# Altium PCB IGrippioV2Pcb.PcbDoc (part 1 of 2)
Units mil, origin at the board's own origin, x right, y up, seen from the top; angles counter-clockwise.
Board outline 2173.3 x 4360 mil, 2 copper layers (Top Layer, Bottom Layer); 134 components, 148 nets, 592 pads, 249 vias.
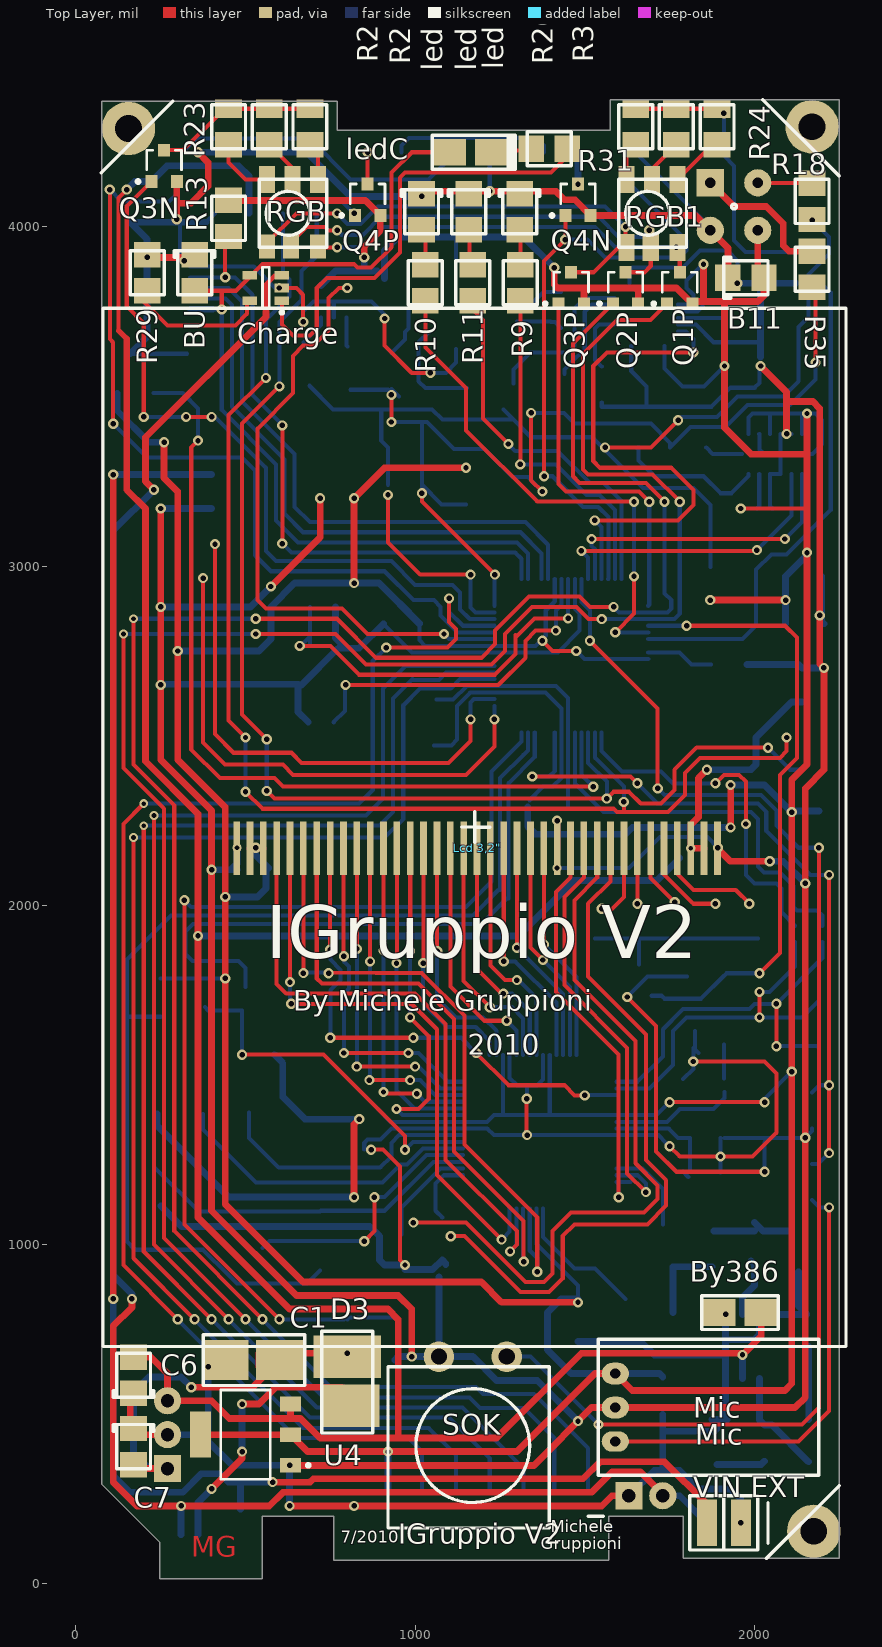
[diagram p0: Top Layer view]
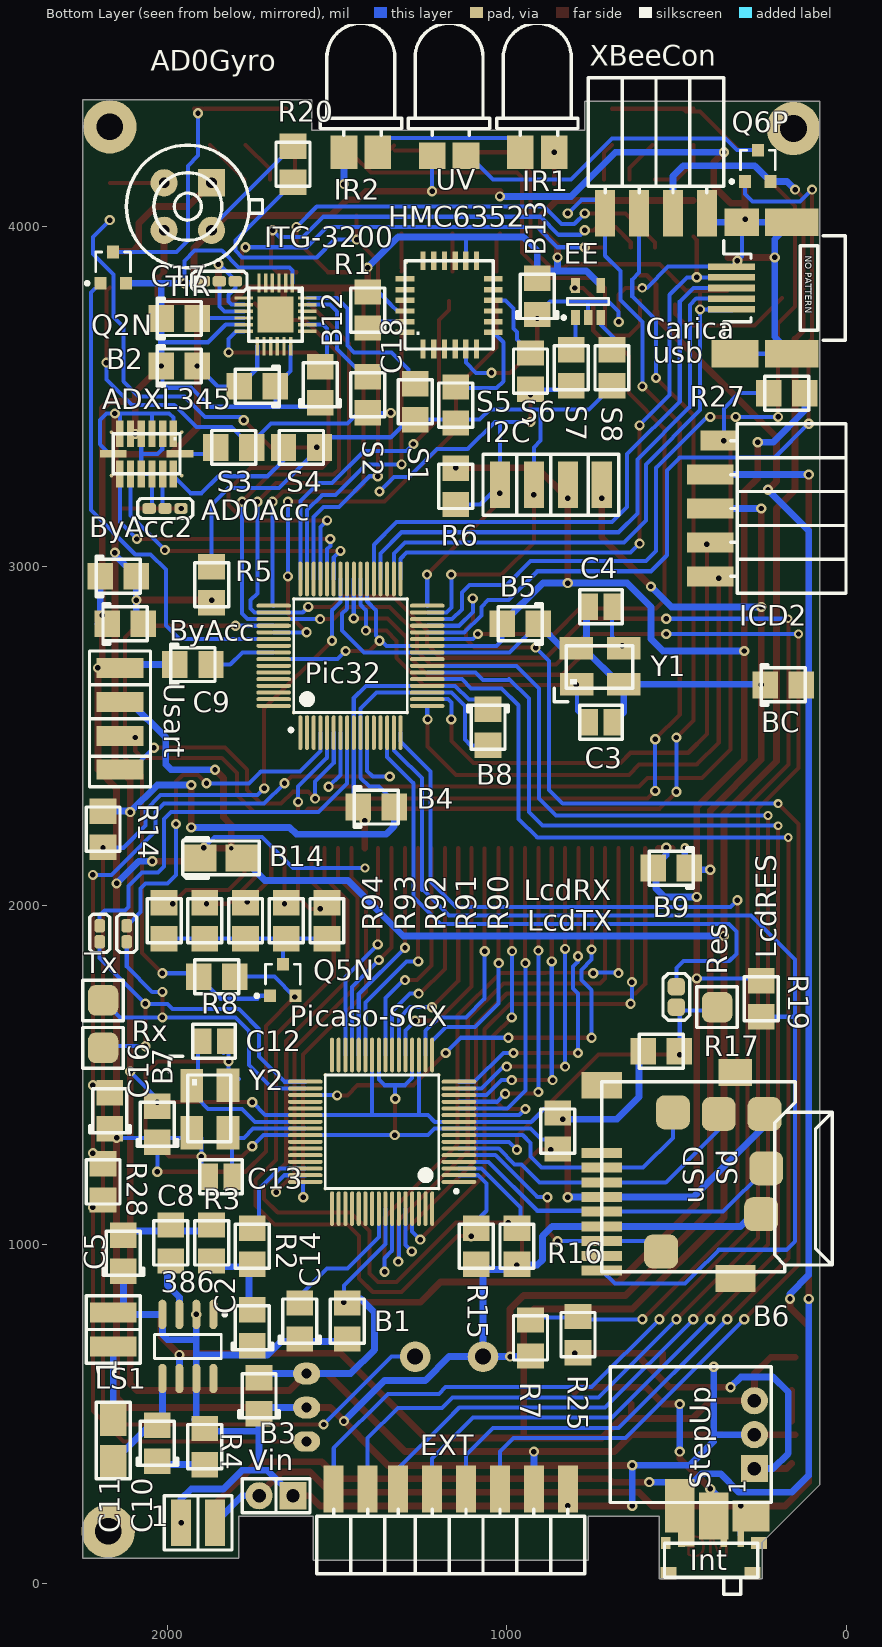
[diagram p1: Bottom Layer view, seen from below]

## Layer stack, top to bottom
Top Layer: signal copper 1.4
Dielectric: dielectric 12.6, FR-4, Dk 4.8
Bottom Layer: signal copper 1.4

## Board outline
247.51,122.49 247.51,15 550,15 550,200 760,200 760,70 1570,70 1570,200 1790,200 1790,75 2250,75 2250,4375 1575,4375 1575,4285 770,4285 770,4370 76.7,4370 76.7,293.3 247.51,122.49

## Design rules (kind name [scope] priority, off if disabled: settings)
Clearance [All] p1: gap=7
HoleSize [All] p1: absolutevalues=TRUE maxlimit=100 minlimit=0 maxpercent=80.000 minpercent=20.000
PolygonConnect [All] p1: connectstyle=Relief reliefconductorwidth=10 reliefentries=4 polygonreliefangle="90 Angle"
RoomDefinition "IGruppioV2SCH (1)" [InComponentClass('IGruppioV2SCH (1)')] p1: confinementstyle=ConfineIn formatcopy=TRUE lockcomponents=FALSE outline -2700,-545 6855,-545 6855,6095 -2700,6095
RoutingVias [All] p1: holewidth=28 width=50 viastyle="Through Hole" minholewidth=28 minwidth=50 maxholewidth=28 maxwidth=50
SilkToSilkClearance [All] p1: silktosilkclearance=0
SilkscreenOverComponentPads [All] p1: minsilkscreentomaskgap=10
SolderMaskExpansion [All] p1: expansion=4
Width [All] p1: maxlimit=100 minlimit=10 preferedwidth=12 minimp=50.000000 maximp=50.000000 favimp=50.000000
25 further rules are at their usual default settings.

## Components (designator, comment, footprint, x,y, rotation, side; value= is the part's Value field where it differs from the comment)
386 "LM386M-1" M08A_N 1940,700 r270 bottom
AD0Acc "Header 3" Solder3#1 1960,3170 r0 bottom
AD0Gyro "Header 3" Solder3#2 1800,3840 r0 bottom
ADXL345 "3axis acc" ADXL345 2160,3390 r270 bottom
B1 "10uF/16V" "SMD 3.5"#1 1520,840 r270 bottom
B2 "10uF/16V" "SMD 3.5 Signed" 1900,3640 r0 bottom
B3 "10uF/16V" "SMD 3.5 Signed" 1780,620 r270 bottom
B4 "10uF/16V" "SMD 3.5 Signed" 1320,2340 r0 bottom
B5 "10uF/16V" "SMD 3.5 Signed" 1025,2780 r180 bottom
B6 "10uF/16V" "SMD 3.5"#1 900,1400 r270 bottom
B7 "10uF/16V" "SMD 3.5 Signed" 2080,1420 r270 bottom
B8 "10uF/16V" "SMD 3.5 Signed" 1005,2460 r90 bottom
B9 "10uF/16V" "SMD 3.5 Signed" 580,2060 r180 bottom
B11 "10uF/16V" "SMD 3.5 Signed" 2040,3900 r180 top
B12 "10uF/16V" "SMD 3.5 Signed" 1800,3480 r180 bottom
B13 "10uF/16V" "SMD 3.5 Signed" 960,3860 r270 bottom
B14 "10uF/16V" "SMD 5.5 Signed" 1780,2140 r0 bottom
BC "10uF/16V" "SMD 3.5 Signed" 120,2700 r0 bottom
BU "10uF/16V" "SMD 3.5 Signed" 400,3800 r90 top
By386 "100uF/16V" "SMD 5.5mm" 2020,800 r180 top
ByAcc "10uF/16V" "SMD 3.5 Signed" 2060,2880 r0 bottom
ByAcc2 "100nF" "SMD 3.5 Signed" 2080,3020 r0 bottom
C1 "470uF/16V" "SMD 7mm"#1 600,660 r180 top
C2 "100nF" "SMD 3.5 Signed" 1800,820 r270 bottom
C3 "15pF" "SMD 3mm"#1 685,2540 r0 bottom
C4 "100nF" "SMD 3mm"#1 760,2880 r180 bottom
C5 "10nF" "SMD 3.5 Signed" 2180,1040 r270 bottom
C6 "100nF" "SMD 3.5 Signed" 220,340 r90 top
C7 "100nF" "SMD 3.5 Signed" 120,680 r270 top
C8 "100nF" "SMD 3.5"#1 1940,940 r90 bottom
C9 "10uF/16V" "SMD 3.5 Signed" 1860,2760 r0 bottom
C10 "47 nF" "SMD 3.5 Signed" 2080,480 r270 bottom
C11 "" "SMD 5.5mm" 2160,360 r90 bottom
C12 "22pF" "SMD 3mm"#2 1900,1600 r180 bottom
C13 "22pF" "SMD 3mm"#1 1880,1200 r180 bottom
C14 "" "SMD 3.5 Signed" 1660,840 r270 bottom
C16 "100nF" "SMD 3.5 Signed" 2220,1460 r270 bottom
C17 "100nF" "SMD 3.5 Signed" 1900,3780 r0 bottom
C18 "2,2nF" "SMD 3.5 Signed" 1600,3600 r270 bottom
Carica "Header 2" "Conn 2smd fem" 1960,180 r180 bottom
Charge "MCP73832T-2ACI/OT" SOT-23-OT5_N 560,3820 r180 top
D3 "Protezione" "SMD 7mm"#2 800,520 r90 top
EE "24AA64T-I/OT" SOT-23-OT5_N 760,3780 r90 bottom
EXT "Header 8" "Conn 8 smd fem - duplicate1" 820,280 r0 bottom locked
HMC6352 "Header 24" Compass 1040,3640 r90 bottom
I2C "Header 4" "Conn 4 smd" 720,3240 r0 bottom
ICD2 "Header 5" "Conn 5 smd fem lungo" 320,3420 r270 bottom locked
Int "SW_SPDT" SwitchSMD 260,20 r90 bottom
IR1 "" "Led 5mm"#1 960,4220 r180 bottom locked
IR2 "" "Led 5mm"#1 1480,4220 r180 bottom locked
ITG-3200 "3axis Gyro" "Gyro Digital" 1760,3820 r270 bottom
"Lcd 3,2\"" "Header 19X2" LCD3,2 80,700 r0 top locked
LcdRES "Sladare" Solder#1 500,1760 r270 bottom
LcdRX "Sladare" Solder#2 2200,1940 r270 bottom
LcdTX "Sladare" Solder#2 2120,1940 r270 bottom
"led 1" "Led Rosso 3mm" "SMD 3.5 Signed" 1208,3980 r90 top
"led 2" "Led Rosso 3mm" "SMD 3.5 Signed" 1358,3980 r90 top
"led 3" "Led Rosso 3mm" "SMD 3.5 Signed" 1069,3980 r90 top
ledC "Led Rosso 3mm" "SMD 5.5" 1100,4220 r0 top
LS1 "Speaker" "Conn 2smd fem" 2160,700 r90 bottom
Mic "Con 3" "Mic mems" 1540,320 r0 top
Pic32 "PIC32MX340F512H-80I/PT" "64 TQFP" 1293.45,2568.45 r90 bottom
Picaso-SGX "PIC32MX340F512H-80I/PT" "64 TQFP" 1200,1500 r0 bottom
Q1P "PMOS-2" SOT-23 1780,3820 r0 top
Q2N "NMOS-2" SOT-23 2160,3880 r180 bottom
Q2P "PMOS-2" SOT-23 1620,3820 r0 top
Q3N "NMOS-2" SOT-23 260,4180 r0 top
Q3P "PMOS-2" SOT-23 1460,3820 r0 top
Q4N "NMOS-2" SOT-23 1480,4080 r0 top
Q4P "NMOS-2" SOT-23 860,4080 r0 top
Q5N "NMOS-3" SOT-23 1660,1780 r180 bottom
Q6P "NMOS-2" SOT-23 260,4180 r180 bottom
R1 "Niente" "SMD 3.5"#1 1460,3820 r270 bottom
R2 "2K2" "SMD 3.5"#1 1800,1060 r270 bottom
R3 "4K7" "SMD 3.5"#1 1820,940 r90 bottom
R4 "10" "SMD 3.5"#1 1840,340 r90 bottom
R5 "10K" "SMD 3.5"#1 1820,2880 r90 bottom
R6 "10K" "SMD 3.5"#1 1200,3300 r270 bottom
R7 "10K" "SMD 3.5"#1 880,660 r90 bottom
R8 "10K" "SMD 3.5"#1 1920,1740 r180 bottom
R9 "330" "SMD 3.5"#1 1260,3900 r270 top
R10 "330" "SMD 3.5"#1 980,3900 r270 top
R11 "330" "SMD 3.5"#1 1120,3900 r270 top
R13 "10K" "SMD 3.5"#1 500,3960 r90 top
R14 "10K" "SMD 3.5"#1 2140,2160 r90 bottom
R15 "47K" "SMD 3.5"#1 1140,1060 r270 bottom
R16 "47K" "SMD 3.5"#1 1020,1060 r270 bottom
R17 "4K7" "SMD 3.5"#1 480,1620 r0 bottom
R18 "10K" "SMD 3.5"#1 2120,4140 r270 top
R19 "10k" "SMD 3.5"#1 200,1660 r90 bottom
R20 "10K" "SMD 3.5"#1 1580,4120 r90 bottom
R21 "330" "SMD 3.5"#2 640,4360 r270 top
R22 "330" "SMD 3.5"#2 520,4360 r270 top
R23 "330" "SMD 3.5"#2 400,4360 r270 top
R24 "330" "SMD 3.5"#2 1840,4360 r270 top
R25 "20K" "SMD 3.5"#1 840,800 r270 bottom
R26 "330" "SMD 3.5"#2 1600,4360 r270 top
R27 "10K" "SMD 3.5"#1 240,3460 r180 bottom
R28 "boo" "SMD 3.5"#1 2140,1120 r90 bottom
R29 "2K" "SMD 3.5"#1 260,3800 r90 top
R30 "330" "SMD 3.5"#2 1720,4360 r270 top
R31 "470" "SMD 3.5"#1 1460,4280 r180 top
R35 "10K" "SMD 3.5"#1 2120,3940 r270 top
R90 "200" "SMD 3.5"#1 1580,2020 r270 bottom
R91 "200" "SMD 3.5"#1 1700,2020 r270 bottom
R92 "200" "SMD 3.5"#1 1820,2020 r270 bottom
R93 "200" "SMD 3.5"#1 1940,2020 r270 bottom
R94 "200" "SMD 3.5"#1 2060,2020 r270 bottom
Res "" Pin 380,1700 r180 bottom
RGB "Header 6" "RGB Smd2"#1 540,4140 r0 top locked
RGB1 "Header 6" "RGB Smd2"#2 1600,4140 r0 top locked
Rx "" Pin 2190,1580 r180 bottom
S1 "Sladare" "SMD 3.5"#1 1220,3420 r90 bottom
S2 "Sladare" "SMD 3.5"#1 1360,3440 r90 bottom
S3 "Sladare" "SMD 3.5"#1 1740,3400 r0 bottom
S4 "Sladare" "SMD 3.5"#1 1540,3400 r0 bottom
S5 "Sladare" "SMD 3.5"#1 1200,3540 r270 bottom
S6 "Sladare" "SMD 3.5"#1 980,3640 r270 bottom
S7 "Sladare" "SMD 3.5"#1 760,3520 r90 bottom
S8 "Sladare" "SMD 3.5"#1 640,3520 r90 bottom
Sd "ESOC010" uSD 720,920 r90 bottom
SOK "SW_PB" "Pulsante piatto grande" 920,640 r270 top locked
StepUp "JUMPER_SEL_DEV" 5VSwitcing 220,640 r0 bottom
TIR "Header 4" SensTempIR 1940,4060 r180 bottom
Tx "" Pin 2190,1720 r180 bottom
U4 "REG1117-3.3" ZZ311 500,440 r90 top
Usart "Header 4" "Conn 4 smd" 2140,2400 r90 bottom
usb "ESOC004" USBmini 160,3820 r270 bottom locked
UV "Led Rosso 3mm" "Led 5mm"#2 1220,4220 r180 bottom locked
Vin "Header 2" "JUMPER_SEL_2 - duplicate" 1630,260 r90 bottom
"VIN EXT" "Header 2" "Conn 2smd fem" 1960,180 r180 top
XBeeCon "Header 4" "Conn 4 smd fem lungo" 760,4120 r180 bottom locked
Y1 "8 MHz" "quarzo smd sparkfun - duplicate" 825,2640 r180 bottom
Y2 "12 MHz" "quarzo smd sparkfun - duplicate" 1940,1500 r270 bottom

## Footprints (in the part's own frame and the unit in brackets; to place one, negate y for a bottom-side part, rotate by r counter-clockwise, add the part's x,y. Pads: shape width x height; smd on the part's side, far side on the other; paste and mask are expansions set on the pad)
5VSwitcing [mil]
  rect 80x80 hole 39.37: 1(50,300)
  round 80 hole 39.37: 2(50,200) 3(50,100)
  silkscreen extent 0,0 475,400
"64 TQFP" [mm]
  round 0.27 smd: 0(0,0) 0(0,8.5) 0(8.5,0) 0(8.5,8.5)
  oval 2.6x0.3 smd: 1(-1.5,8) 2(-1.5,7.5) 3(-1.5,7) 4(-1.5,6.5) 5(-1.5,6) 6(-1.5,5.5) 7(-1.5,5) 8(-1.5,4.5) 9(-1.5,4) 10(-1.5,3.5) 11(-1.5,3) 12(-1.5,2.5) 13(-1.5,2) 14(-1.5,1.5) 15(-1.5,1) 16(-1.5,0.5) 33(10,0.5) 34(10,1) 35(10,1.5) 36(10,2) 37(10,2.5) 38(10,3) 39(10,3.5) 40(10,4) 41(10,4.5) 42(10,5) 43(10,5.5) 44(10,6) 45(10,6.5) 46(10,7) 47(10,7.5) 48(10,8)
  oval 0.3x2.6 smd: 17(0.5,-1.5) 18(1,-1.5) 19(1.5,-1.5) 20(2,-1.5) 21(2.5,-1.5) 22(3,-1.5) 23(3.5,-1.5) 24(4,-1.5) 25(4.5,-1.5) 26(5,-1.5) 27(5.5,-1.5) 28(6,-1.5) 29(6.5,-1.5) 30(7,-1.5) 31(7.5,-1.5) 32(8,-1.5) 49(8,10) 50(7.5,10) 51(7,10) 52(6.5,10) 53(6,10) 54(5.5,10) 55(5,10) 56(4.5,10) 57(4,10) 58(3.5,10) 59(3,10) 60(2.5,10) 61(2,10) 62(1.5,10) 63(1,10) 64(0.5,10)
  silkscreen extent -1.42,0 8.5,8.83, body extent -0.75,-0.75 9.25,9.25, height 1.2
ADXL345 [mm]
  round 0.27 smd: 0(-0.125,-0.125) 0(-0.125,5.125) 0(3.125,-0.125) 0(3.125,5.125)
  rect 2x0.55 smd: 1(0,4.5) 2(0,3.7) 3(0,2.9) 4(0,2.1) 5(0,1.3) 6(0,0.5) 8(3,0.5) 9(3,1.3) 10(3,2.1) 11(3,2.9) 12(3,3.7) 13(3,4.5)
  rect 0.55x2 smd: 7(1.5,0) 14(1.5,5)
  silkscreen extent 0,0 3,5
Compass [mm]
  round 0.27 smd: 0(0,0) 0(0,6.5) 0(6.5,0) 0(6.5,6.5)
  rect 1.4x0.4 smd: 1(0,5.25) 2(0,4.45) 3(0,3.65) 4(0,2.85) 5(0,2.05) 6(0,1.25) 13(6.604,1.25) 14(6.604,2.05) 15(6.604,2.85) 16(6.604,3.65) 17(6.604,4.45) 18(6.604,5.25)
  rect 0.4x1.4 smd: 7(1.25,0) 8(2.05,0) 9(2.85,0) 10(3.65,0) 11(4.45,0) 12(5.25,0) 19(5.25,6.604) 20(4.45,6.604) 21(3.65,6.604) 22(2.85,6.604) 23(2.05,6.604) 24(1.25,6.604)
  silkscreen extent 0,0 6.6,6.6
"Conn 2smd fem" [mm]
  rect 1.5x3.5 smd: 1(0,0) 2(2.54,0)
  silkscreen extent -1.27,-2.03 3.81,2.03
"Conn 4 smd" [mm]
  rect 1.5x3.5 smd: 1(0,0) 2(2.54,0) 3(5.08,0) 4(7.62,0)
  silkscreen extent -1.27,-2.29 8.89,2.29
"Conn 4 smd fem lungo" [mm]
  rect 1.5x3.5 smd: 1(1.27,-2.032) 2(3.81,-2.032) 3(6.35,-2.032) 4(8.89,-2.032)
  silkscreen extent 0,-0.51 10.16,8.13
"Conn 5 smd fem lungo" [mm]
  rect 1.5x2.763 smd: 1(1.27,-1.372)
  rect 1.5x3.5 smd: 2(3.81,-2.032) 3(6.35,-2.032) 4(8.89,-2.032) 5(11.43,-2.032)
  silkscreen extent 0,-0.51 12.7,8.13
"Conn 8 smd fem - duplicate1" [mm]
  rect 1.5x3.5 smd: 1(0,0) 2(2.54,0) 3(5.08,0) 4(7.62,0) 5(10.16,0) 6(12.7,0) 7(14.986,0) 8(17.526,0)
  silkscreen extent -1.27,1.52 18.8,6.35
"Gyro Digital" [mm] "qfn 24"
  round 0.27 smd: 0(0,0) 0(0,4) 0(4,0) 0(4,4)
  rect 1.4x0.25 smd: 1(-0.375,3.25) 2(-0.375,2.75) 3(-0.375,2.25) 4(-0.375,1.75) 5(-0.375,1.25) 6(-0.375,0.75) 13(4.354,0.625) 14(4.354,1.125) 15(4.354,1.625) 16(4.354,2.125) 17(4.354,2.625) 18(4.354,3.125)
  rect 0.25x1.4 smd: 7(0.75,-0.375) 8(1.25,-0.375) 9(1.75,-0.375) 10(2.25,-0.375) 11(2.75,-0.375) 12(3.25,-0.375) 19(3.25,4.375) 20(2.75,4.375) 21(2.25,4.375) 22(1.75,4.375) 23(1.25,4.375) 24(0.75,4.375)
  rect 2.7x2.7 smd: NC(2,2)
  silkscreen extent 0,0 4,4
"JUMPER_SEL_2 - duplicate" [mil]
  rect 80x80 hole 39.37: 1(0,0)
  round 80 hole 39.37: 2(0,100)
  silkscreen extent -50,-50 50,150
LCD3,2 [mm]
  rect 0.5x4 smd: 1(10,37.3) 2(11,37.3) 3(12,37.3) 4(13,37.3) 5(14,37.3) 6(15,37.3) 7(16,37.3) 8(17,37.3) 9(18,37.3) 10(19,37.3) 11(20,37.3) 12(21,37.3) 13(22,37.3) 14(23,37.3) 15(24,37.3) 16(25,37.3) 17(26,37.3) 18(27,37.3) 19(28,37.3) 20(29,37.3) 21(30,37.3) 22(31,37.3) 23(32,37.3) 24(33,37.3) 25(34,37.3) 26(35,37.3) 27(36,37.3) 28(37,37.3) 29(38,37.3) 30(39,37.3) 31(40,37.3) 32(41,37.3) 33(42,37.3) 34(43,37.3) 35(44,37.3) 36(45,37.3) 37(46,37.3)
  silkscreen extent 0,0 55.63,77.72
"Led 5mm"#1 [mm]
  rect 2x2.5 smd: 1(0,0) 2(2.54,0)
  silkscreen extent -1.78,1.27 4.32,9.65
"Led 5mm"#2 [mm]
  rect 2x1.992 smd: 1(0,-0.254) 2(2.54,-0.254)
  silkscreen extent -1.78,1.27 4.32,9.65
M08A_N [mm] "SOIC, 8-Leads, Body 4.9x3.9mm, Pitch 1.27mm, IPC Medium Density"
  oval 2.2x0.6 smd: 1(-2.4,1.905) 2(-2.4,0.635) 3(-2.4,-0.635) 4(-2.4,-1.905) 5(2.4,-1.905) 6(2.4,-0.635) 7(2.4,0.635) 8(2.4,1.905)
  silkscreen extent -2.52,-2.5 0.9,2.88, body extent -2,-2.5 2,2.5, height 1.75
"Mic mems" [mil]
  oval 80x64 hole 30: 1(50,300) 2(50,200)
  oval 80x60 hole 30: 3(50,100)
  silkscreen extent 0,0 650,402
Pin [mil]
  rrect50% 90x90 smd: 1(0,0)
  silkscreen extent -60,-60 60,60
"Pulsante piatto grande" [mil]
  round 90 hole 47.24: 1(-30,350) 2(-30,150)
  silkscreen extent 0,0 475,475
"quarzo smd sparkfun - duplicate" [mm]
  rect 2.5x1.7 smd: 0(0.762,3) 0(4.318,0.3) 1(0.8,0.3) 2(4.318,3)
  silkscreen extent 0,0 5,3.2
"RGB Smd2"#1 [mm]
  rect 1.2x2 smd: 1(0.6,0) 2(2.5,0) 3(4.4,0)
  rect 1.2x1.778 smd: 4(0.6,-5.029) 5(2.4,-5.029) 6(4.4,-5.029)
  silkscreen extent 0,-5.08 5.08,0
"RGB Smd2"#2 [mm]
  rect 1.2x2 smd: 1(0.6,0) 2(2.5,0) 3(4.4,0) 4(0.6,-5.1) 5(2.4,-5.1) 6(4.4,-5.1)
  silkscreen extent 0,-5.08 5.08,0
SensTempIR [mil]
  rect 80x80 hole 31.5: 1(70,70)
  round 80 hole 31.5: 2(-70,70) 3(-70,-70) 4(70,-70)
  silkscreen extent -181,-181 220,181
"SMD 3.5"#1 [mm]
  rect 1.9x2 smd: 1(0.3,1.27) 2(3,1.27)
  silkscreen extent 0,0 3.3,2.54
"SMD 3.5"#2 [mm]
  rect 1.4x2 smd: 1(0.3,1.27)
  rect 1.9x2 smd: 2(3,1.27)
  silkscreen extent 0,0 3.3,2.54
"SMD 3.5 Signed" [mm]
  rect 1.9x2 smd: 1(0.3,1.27) 2(3,1.27)
  silkscreen extent 0,-0.25 3.3,2.79
"SMD 3mm"#1 [mm]
  rect 1.5x2 smd: 1(0,0) 2(1.905,0)
  silkscreen extent -0.64,-1.27 2.54,1.27
"SMD 3mm"#2 [mm]
  rect 1.5x1.924 smd: 1(0,0) 2(1.905,0)
  silkscreen extent -0.64,-1.27 2.54,1.27
"SMD 5.5" [mm]
  rect 2.5x2 smd: 1(0,0) 2(3.175,0)
  silkscreen extent -1.27,-1.27 4.44,1.27
"SMD 5.5 Signed" [mm]
  rect 2.5x2 smd: 1(0,0) 2(3.175,0)
  silkscreen extent -1.27,-1.52 4.44,1.52
"SMD 5.5mm" [mm]
  rect 2.5x2 smd: 1(0,0) 2(3.175,0)
  silkscreen extent -1.27,-1.27 4.44,1.27
"SMD 7mm"#1 [mm]
  rect 3.5x3 smd: 1(0,0) 2(4.064,0)
  silkscreen extent -1.91,-1.91 5.71,1.91
"SMD 7mm"#2 [mm]
  rect 3.195x4.321 smd: 1(0.127,-0.254)
  rect 3.195x5.083 smd: 2(3.81,0)
  silkscreen extent -1.91,-1.91 5.71,1.91
Solder#1 [mm]
  rrect50% 1.3x1.3 smd: 1(0,0) 2(1.52,0)
  silkscreen extent -1,-1 2.5,1
Solder#2 [mm]
  rrect50% 1x0.8 smd: 1(0,0) 2(1.2,0)
  silkscreen extent -0.87,-0.75 2,0.75
Solder3#1 [mm]
  rrect50% 1x0.8 smd: 1(0,0) 2(1.2,0) 3(2.388,0)
  silkscreen extent -0.87,-0.75 3.25,0.75
Solder3#2 [mm]
  rrect50% 1x0.8 smd: 1(0,0) 2(1.2,0) 3(2.38,0)
  silkscreen extent -0.87,-0.75 3.25,0.75
SOT-23 [mm] "SOT-23; 3 Leads; Body 3.1 x 2.5 mm, inc. leads (LxW max)"
  rect 0.9x0.95 smd: 1(-0.95,-1.175) 2(0.95,-1.175) 3(0,1.175)
  silkscreen extent -2.07,-1.3 1.3,1.18
SOT-23-OT5_N [mm] "SOT23, 5-Leads, Body 2.9x1.6mm, Pitch 0.95mm, Lead Span 2.7mm, IPC Medium Density"
  rect 1.1x0.65 smd: 1(-1.2,0.95) 2(-1.2,0) 3(-1.2,-0.95) 4(1.2,-0.95) 5(1.2,0.95)
  silkscreen extent -1.33,-1.55 0.25,1.95, body extent -0.9,-1.55 0.9,1.55, height 1.45
SwitchSMD [mm]
  rect 0.9x1.2 smd: 0(0.292,0.396) 0(0.292,6.696) 0(2.54,-0.1)
  rect 0.9x0.7 smd: 0(2.54,6.896)
  rect 1.8x0.5 smd: 1(3.175,1.27) 2(3.175,2.54) 3(3.175,5.715)
  silkscreen extent -1.27,0 2.54,6.98
USBmini [mm] "54819-0572 -- USB Mini-B Recept"
  rect 0.5x3.5 smd: 1(-1.6,-4.5) 2(-0.8,-4.5) 3(0,-4.5) 4(0.8,-4.5) 5(1.6,-4.5)
  rect 2.05x4 smd: G1(-4.925,0) G3(4.925,0)
  rect 2.05x2.6 smd: G2(-4.925,-3.736)
  rect 2.05x3.5 smd: G4(4.925,-4.25)
  silkscreen extent -3.9,-5.08 3.9,4
uSD [mm]
  rect 2x3 smd: 0(-0.508,-10) 0(13.97,0)
  rect 2x2.5 smd: 0(14.924,-10)
  rect 0.75x3 smd: 1(8.9,0) 2(7.8,0) 3(6.7,0) 4(5.6,0) 5(4.5,0) 6(3.4,0) 7(2.3,0) 8(1.2,0) CD1(0.1,0)
  silkscreen extent 0,-17.27 14.22,0
ZZ311 [mm] "SOT-223/SC-73; 4 Leads; Body 6.7 x 7.3 mm, inc. leads (LxW max)"
  rect 1.1x1.55 smd: 1(-2.3,-3.375) 2(0,-3.375) 3(2.3,-3.375)
  rect 3.45x1.55 smd: 4(0,3.375)
  silkscreen extent -3.35,-4.83 3.35,1.85

## Part data
386: "Low Voltage Audio Power Amplifier"
AD0Acc AD0Gyro: "Header, 3-Pin"
ADXL345: library part "Header 14", "Header, 14-Pin"
B1 B2 B3 B4 B5 B6 B7 B8 B9 B11 B12 B13 B14 BC BU By386 ByAcc C1 C9 C11 C14 C17 C18: library part CAP_POL, "Condensatore polarizzato"
ByAcc2 C6 C7: library part "CAP_NON POL_1", "Capacitor"
C2 C3 C4 C5 C8 C10 C12 C13 C16: library part "CAP_NON POL", "Capacitor"
Carica Vin "VIN EXT": "Header, 2-Pin"
Charge: "Miniature Single-Cell, Fully Integrated Li-Ion, Li-Polymer Charge Management Controller, 4.2V, 5-Pin SOT-23, Industrial Temperature, Tape and Reel"
D3: library part DIODE_1N4001, "1 Amp General Purpose Rectifier"
EE: "64Kbit, 400kHz, 1.7V, I2C Serial EEPROM, 5-Pin SOT-23, Industrial Temperature, Tape and Reel"
EXT: "Header, 8-Pin"
HMC6352: "Header, 24-Pin"
I2C TIR Usart XBeeCon: "Header, 4-Pin"
ICD2: "Header, 5-Pin"
Int: "SPDT Subminiature Toggle Switch, Right Angle Mounting, Vertical Actuation"
IR1 IR2: library part JUMPER_SEL_2, "Contattiera per jumper di selezione"
ITG-3200: library part "Header 24", "Header, 24-Pin"
"Lcd 3,2\"": "Header, 19-Pin, Dual row"
LcdRES LcdRX LcdTX R1 R2 R3 R4 R5 R6 R7 R8 R9 R10 R11 R13 R14 R15 R16 R17 R18 R19 R20 R21 R22 R23 R24 R25 R26 R27 R28 R29 R30 R31 R35 R90 R91 R92 R93 R94 S1 S2 S3 S4 S5 S6 S7 S8: library part RES_1, "Resistor"
"led 1" "led 2" "led 3" ledC UV: library part DIODE_LED_3, "Typical BLUE SiC LED"
LS1: "Loudspeaker"
Pic32 Picaso-SGX: "32-Bit Flash Microcontroller with USB, 53 IOs, 512KB Program Memory, 64-pin TQFP"
Q1P Q2P Q3P Q5N: library part NMOS-2, "N-Channel Power MOSFET"
Q2N Q3N Q4N Q4P Q6P: "N-Channel Power MOSFET"
Res Rx Tx: library part Antenna, "Generic Antenna"
RGB RGB1: "Header, 6-Pin"
Sd: "CYSD801 -- TRANSFLASH CARD CONNECTOR"
SOK: "Switch"
StepUp: "Contattiera per jumper di selezione"
U4: "800mA and 1A Low Dropout Positive Regulator 2.85V, 3.3V, 5V, and Adjustable"
usb: "54819-0572 -- USB Mini-B Recept"
Y1 Y2: library part CRYSTAL_2GND, "Crystal"

## Free pads (board coordinates)
  rrect50% 100x100 smd far side: 0(235,1225) 0(240,1385) 0(250,1090) 0(375,1385) 0(510,1390) 0(545,980)
  rect 110.24x90.55 smd far side: 0(280,200)
  round 157.48 hole 78.74: 1(155,4290) 1(2170,4295) 1(2175,155)
  rect 86.61x137.8 smd far side: 1(390,200)
  rect 45.67x59.06 smd far side: 1(470,140)
  rect 86.61x157.48 smd far side: 1(490,230)

## Via types
v1: diameter 30, hole 16, Top Layer to Bottom Layer, 239 vias
v2: diameter 26, hole 14, Top Layer to Bottom Layer, 6 vias
v3: diameter 27, hole 14, Top Layer to Bottom Layer, 3 vias
v4: diameter 28, hole 16, Top Layer to Bottom Layer, 1 vias

## Nets (pads, with @x,y where several pads share a name; then routed paths per layer and width w, separated by ;. In a path a pad name is that pad's centre, name@x,y a point inside that pad or via, vN(x,y) a via of type N, cw(c..) or ccw(c..) an arc to the next point about the centre after c; other vN are vias at no path point)
3.3V: "Lcd 3,2\".2" "Lcd 3,2\".3" AD0Acc.1 AD0Gyro.1 ADXL345.1 ADXL345.3 ADXL345.6 ADXL345.7 B1.1 B2.1 B3.1 B4.1 B5.1 B6.1 B7.1 B8.1 B9.1 B11.1 B12.1 B13.1 ByAcc2.1 ByAcc.1 EE.4 EXT.2 HMC6352.14 I2C.2 ITG-3200.8 ITG-3200.13 Mic.1 pad.0@240,1385 Pic32.10 Pic32.19 Pic32.26 Pic32.38 Pic32.57 Picaso-SGX.10 Picaso-SGX.19 Picaso-SGX.26 Picaso-SGX.38 Picaso-SGX.57 Q1P.2 Q2P.2 Q3P.2 Q4P.2 R5.1 R6.1 R13.2 R14.2 R17.2 R19.2 R27.2 Sd.4 TIR.3 U4.2 U4.4 | length 22439.4
  Top Layer w12: v1@1372.35,2782.65 1405,2750 v1(1475,2750) ; v1(1750,1420) v1(2030,1420) ; v1(1960,3170) 2155,3170 ; B11.1@2010,3868.19 B11.1@2028.19,3850
  Top Layer w20: v1(260,3365) 260,3260 300,3220 v1(300,2750) 300,2430 440,2290 v1(440,2025) v1(440,1785) 440,1120 670,890 1195,890 1255,830 1295,830 1310,830 v1(1480,830) ; U4.4@367.13,440 U4.2@632.87,440 682.87,390 v1(920,390) 1300,390 1530,620 Mic.1@1590,620 1640,570 2090,570 2110,590 v1(2110,1510) v1(2110,2275) 2110,2370 2155,2415 v1(2155,3040) 2155,3170 2155,3330 ; R13.2@450,4078.11 853.03,4078.11 Q4P.2@897.4,4033.74 897.4,3990 850,3942.6 v1(850,3910) ; 513.07,2168.5 552.44,2168.5 ; v1(820,1140) 820,1355 v1(835,1370) ; v1(820,2950) v1(820,3200) 910,3290 v1(1150,3290) ; v1(1410,3880) 1410,3830 1420,3820 1490,3820 ; Q3P.2@1497.4,3773.74 1497.4,3812.6 1490,3820 ; Q2P.2@1657.4,3773.74 1657.4,3812.6 1650,3820 ; v1(1850,3890) 1850,3780 ; v1(1870,2900) v1(2091.81,2900) ; v1(1930,2230) v1(1930,2355) ; B11.1@2010,3868.19 TIR.3@2010,3990 ; B11.1@2028.19,3850 2028.19,3798.19 2010,3780 1910,3780 ; v1(2155,3450) 2155,3330 ; 1490,3820 1650,3820 ; 1650,3820 1770,3820 1810,3780 1850,3780 ; 1850,3780 1910,3780 ; 1910,3780 1911.81,3778.19 v1(1911.81,3590) 1911.81,3408.19 1990,3330 2155,3330
  Bottom Layer w12: R19.2@250,1785 v1(440,1785) ; 890,1400 927.8,1362.2 Picaso-SGX.10@1140.94,1362.2 1212.2,1362.2 1231.89,1381.89 1395,1381.89 ; B5.1@1013.19,2831.81 B5.1@1013.19,2830 1013.19,2781.81 1029.7,2765.3 Pic32.26@1234.4,2765.3 1355,2765.3 1385,2795.3 1385,2870 1411.56,2896.56 Pic32.38@1411.56,2962.15 ; B8.1@1055,2471.81 1106.81,2471.81 1123.45,2488.45 1123.45,2588.45 1162.51,2627.51 Pic32.19@1234.4,2627.51 1383.74,2627.51 1431.25,2580 Pic32.10@1431.25,2509.4 1431.25,2376.25 1405,2350 1376.81,2350 B4.1@1336.81,2310 ; HMC6352.14@1120.71,3900 1120.71,3969.29 ; 1259.06,1381.89 Picaso-SGX.19@1259.06,1559.06 ; Picaso-SGX.57@1357.48,1106.3 1357.48,1002.52 1480,880 B1.1@1480,840 ; Picaso-SGX.26@1396.85,1559.06 1396.85,1383.74 1395,1381.89 ; v1(1475,2750) 1499.07,2725.93 Pic32.57@1687.15,2725.93 ; ITG-3200.13@1735.39,3648.58 1735.39,3582.8 B12.1@1788.19,3530 1851.81,3530 v1(1911.81,3590) ; v1(1750,1420) 1711.89,1381.89 Picaso-SGX.38@1593.7,1381.89 1395,1381.89 ; ITG-3200.8@1774.76,3770.79 1810.79,3770.79 1820,3780 1820,3800 1800,3820 AD0Gyro.1@1800,3840 1800,3841.96 1848.04,3890 v1(1850,3890) ; ADXL345.1@1982.83,3390 1982.83,3437.83 1995,3450 v1(2155,3450) 2180,3450 2199.32,3430.68 2199.32,3359.32 2170.94,3330.94 ADXL345.7@2160,3330.94 ; B7.1@2000,1420 v1(2030,1420) 2030,1430 v1(2110,1510) ; ADXL345.3@2045.83,3390 2045.83,3445.83 ; v1(2110,2275) v1@2113.11,2278.11 ; ADXL345.6@2140.31,3390 v1@2140.31,3449.69
  Bottom Layer w20: R27.2@121.89,3510 121.89,3458.11 215,3365 v1(260,3365) ; pad.0@240,1385 240,1350 449.53,1140.47 Sd.4@720,1140.47 819.53,1140.47 v1(820,1140) ; v1(300,2750) 540,2750 575,2785 575,2880 645,2950 v1(820,2950) 893.19,2950 B5.1@1013.19,2830 ; v1(440,2025) 535,2025 560,2050 560,2101.81 B9.1@568.19,2110 530,2148.19 v1(530,2170) ; R17.2@585,1560 610,1535 610,1435 675,1370 v1(835,1370) ; EE.4@722.6,3827.24 765.35,3870 850,3870 ; v1(850,3910) 850,3870 ; B13.1@888.19,3870 850,3870 ; B13.1@910,3848.19 910,3930 950,3970 1120,3970 ; EXT.2@920,280 v1(920,390) ; 955,2890 B5.1@1013.19,2831.81 ; 1120.71,3969.29 1120,3970 ; B4.1@1331.81,2290 1331.81,2233.19 1355,2210 1620,2210 1640,2230 v1(1930,2230) ; v1(1410,3880) 1320,3970 1120,3970 ; B1.1@1480,840 1430,840 1390,800 1390,690 1460,620 Mic.1@1590,620 ; Mic.1@1593.18,620 Mic.1@1590,620 ; B3.1@1730,610 1720,620 Mic.1@1590,620 ; v1(1930,2355) 2030,2355 v1(2110,2275) ; ByAcc.1@2091.81,2830 v1(2091.81,2900) ByAcc2.1@2091.81,2970 2155,3033.19 v1(2155,3040) ; v1@2113.11,2278.11 R14.2@2190,2278.11
  other v1: 1375,2780
38KHZ: Pic32.46 Q4N.1 R20.1 | length 1876.9
  Top Layer w12: v1(1380,3265) 1380,3900 v1(1442.6,3962.6) Q4N.1@1442.6,4033.74
  Bottom Layer w12: v1(1380,3265) 1405,3265 1495,3175 1539.73,3175 1569.73,3145 1569.73,2962.84 Pic32.46@1569.04,2962.15 ; v1(1442.6,3962.6) 1507.4,3962.6 1560,3910 1780,3910 1800,3930 1800,3960 1630,4130 R20.1@1630,4131.81
+5V: 386.6 "Lcd 3,2\".35" "Lcd 3,2\".36" B14.1 By386.1 C7.1 Q6P.2 StepUp.3 U4.3 Usart.3 XBeeCon.3 | length 9242.2
  Top Layer w12: 125.76,3694.24 125.76,4085.76 v1(150,4110)
  Top Layer w16: 125.76,3694.24 150.29,3669.71
  Top Layer w20: C7.1@150,668.19 221.81,668.19 270,620 StepUp.3@270,540 400,540 452,488 662,488 720,430 950,430 ; 150,3669.42 150,3225 205,3170 205,2425 360,2270 v1(360,1910) 360,1080 630,810 920,810 950,780 950,430 ; 632.87,492.87 U4.3@632.87,530.55 ; 1851.65,2168.5 v3(1812.28,2168.5) 1812.28,2237.28 1835,2260 1835,2375 v1(1860,2400) ; v1@1960,680 1490,680 1240,430 950,430 ; v1(1965,675) 2020,730 By386.1@2020,800
  Bottom Layer w20: v1(150,4110) 173.74,4133.74 Q6P.2@222.6,4133.74 268.86,4180 480,4180 510,4150 XBeeCon.3@510,4040 ; v1(360,1910) 1305,1910 1468.16,2073.16 1713.16,2073.16 B14.1@1780,2140 ; v1(1860,2400) 1990,2400 2005,2415 2005,2495 2110,2600 Usart.3@2140,2600 ; 386.6@1965,605.51 v1(1965,675)
A4: Pic32.24
A15: Pic32.13
ALIM: "VIN EXT.2" ICD2.2 Int.3 pad.1@470,140 pad.1@490,230 | length 5270.5
  Top Layer w20: v1(110,840) v1(110,3270) ; v1(580,300) 690,300 700,310 1495,310 1545,360 ; 1565,360 1545,360 ; 1860,180 1860,235 1735,360 1545,360
  Bottom Layer w20: v1(110,840) 110,320 160,270 315,270 370,325 425,325 450,300 v1(580,300) ; v1(110,3270) ICD2.2@400,3270 ; pad.1@485,220 pad.1@485,295
ALIM2: BC.1 Carica.2 Charge.3 Int.1 pad.0@280,200 Vin.2 | length 5818.3
  Top Layer w14: 560,3750 560,3830 587.4,3857.4 Charge.3@607.24,3857.4
  Top Layer w20: v1(165,840) 165,815 110,760 110,300 180,230 v1(310,230) 570,230 610,270 1520,270 1580,330 1664.04,330 1730,264.04 Vin.2@1730,260 ; v1(230,3225) 205,3250 205,3380 560,3735 560,3750
  Bottom Layer w15: v1(230,3225) v1@235,3230
  Bottom Layer w20: v1(165,840) 165,855 110,910 110,3105 v1(230,3225) ; Int.1@310,145 v1(310,230) ; Vin.2@1730,260 1780,260 Carica.2@1860,180
AN0-TX: EXT.3 Pic32.29 | length 4275.7
  Top Layer w12: 140,990 140,1000 ; v2(200,2300) 140,2240 140,1000 ; v1(300,780) 140,940 140,1000 ; v1(915,2760) 1095,2760 1120,2785 1120,2815 1100,2835 v1(1100,2905)
  Bottom Layer w12: v2(200,2300) 835,2300 875,2340 875,2720 v1(915,2760) ; v1(300,780) 650,430 980,430 1020,390 EXT.3@1020,280 ; v1(1100,2905) 1100,2865 1140.64,2824.36 Pic32.29@1234.4,2824.36
AN1: EXT.4 Pic32.21 | length 4004.3
  Top Layer w12: 170,1010 170,1030 ; v2(170,2200) 170,1030 ; v1(350,780) 170,960 170,1030
  Bottom Layer w12: v2(170,2200) 910,2200 965,2255 965,2370 965,2590 1015,2640 1105,2640 1131.88,2666.88 Pic32.21@1234.4,2666.88 ; v1(350,780) 670,460 1040,460 1120,380 EXT.4@1120,280
AN2: EXT.5 Pic32.22 | length 4023.5
  Top Layer w12: v2(200,2235) 200,980 v1(400,780)
  Bottom Layer w12: v2(200,2235) 895,2235 935,2275 935,2610 992.78,2667.78 995.57,2665 1070,2665 1091.56,2686.56 1095,2686.56 Pic32.22@1234.4,2686.56 ; v1@410,770 690,490 1100,490 1220,370 EXT.5@1220,280
AN3: EXT.6 Pic32.23 | length 4179.7
  Top Layer w12: v2(230,2265) 230,1000 v1(450,780)
  Bottom Layer w12: v2(230,2265) 855,2265 905,2315 905,2490 ; v1(450,780) 710,520 1140,520 1181.02,478.98 1320,340 EXT.6@1320,280 ; 905,2480 905,2490 ; 1031.25,2706.25 1135,2706.25 ; Pic32.23@1234.4,2706.25 1135,2706.25 ; 905,2490 905,2640 971.25,2706.25 1135,2706.25
AUDIO: Picaso-SGX.46 R2.1 | length 265.6
  Bottom Layer w12: Picaso-SGX.46@1593.7,1224.41 1670,1224.41 1730,1164.41 R2.1@1730,1060
BATT: Pic32.16 R7.2 R25.1 | length 3114.3
  Top Layer w12: v1(320,2015) 320,1060 v1(600,780)
  Bottom Layer w12: v1(320,2015) 340,1995 1150,1995 1225,2070 1225,2394.04 ; v1(600,780) R25.1@790,780 ; R25.1@800,780 805,785 R7.2@940,785 ; 1224.52,2394.52 1313.14,2483.14 Pic32.16@1313.14,2509.4 Pic32.16@1313.14,2498.14
CD: Pic32.15 R19.1 Sd.CD1 | length 3249.4
  Bottom Layer w12: 151.81,1671.81 R19.1@250,1671.81 ; Sd.CD1@720,923.94 681.06,885 475,885 447.93,912.07 375,985 175,985 150,1010 150,1840 280,1970 1170,1970 1245,2045 1250,2045 1250,2375 1320.22,2445.22 ; 1320.97,2445.22 1332.82,2457.07 Pic32.15@1332.82,2509.4
CLK1: C12.1 Picaso-SGX.39 Y2.1 | length 464.9
  Bottom Layer w12: Picaso-SGX.39@1593.7,1362.2 1742.2,1362.2 1780,1400 1880,1400 1912.13,1432.13 Y2.1@1912.13,1450 ; Y2.1@1910,1490.32 C12.1@1910,1590
CLK2: C13.2 Picaso-SGX.40 Y2.2 | length 348.8
  Bottom Layer w12: Picaso-SGX.40@1593.7,1342.52 1747.48,1342.52 1775.04,1314.96 1809.76,1314.96 C13.2@1809.76,1215.24 ; C13.2@1789.76,1215.24 C13.2@1805,1200
CLKI: C3.2 Pic32.39 Y1.1 | length 1000.1
  Top Layer w12: v1(795,2650) 875,2650 1245,2650 1325,2730 1325,2780 1355,2810 v1(1415,2810)
  Bottom Layer w12: C3.2@760,2540 793.5,2573.5 Y1.1@793.5,2651.81 ; v1(1415,2810) 1415,2870 1431.25,2886.25 Pic32.39@1431.25,2962.15
CLKO: C4.2 Pic32.40 Y1.2 | length 1239.2
  Top Layer w12: v1(660,2765) 750,2765 835,2680 1235,2680 1295.63,2740.63 1295.63,2790 ; 1295.63,2796.56 1295.63,2790 ; v1(1450.93,2845.93) 1351.56,2845.93 1295.63,2790
  Bottom Layer w12: Y1.2@655,2758.11 690,2793.11 690,2765 C4.2@690,2880 ; v1(1450.93,2845.93) Pic32.40@1450.93,2962.15
D0: "Lcd 3,2\".9" Picaso-SGX.16 | length 1002.4
  Top Layer w12: v1@788.66,1850 788.66,2168.5 ; v1(790,1565) v1(980,1565)
  Bottom Layer w12: v1(790,1565) 790,1740.97 804.52,1755.48 804.52,1819.52 790,1834.03 v1(790,1850) ; v1(980,1565) 1010,1565 1094.69,1480.31 Picaso-SGX.16@1140.94,1480.31 Picaso-SGX.16@1140.32,1480.93
D1: "Lcd 3,2\".10" Picaso-SGX.15 | length 1014.3
  Top Layer w12: v1(828.03,1525) v1(1000,1525) ; v1(828.03,1871.97) 828.03,2168.5
  Bottom Layer w12: v1(828.03,1525) v1(828.03,1871.97) ; v1@990,1525 1010,1525 1035,1500 ; 1020,1515 1035,1500 ; Picaso-SGX.15@1140.94,1460.63 1074.37,1460.63 1035,1500
D2: "Lcd 3,2\".11" Picaso-SGX.14 | length 972.6
  Top Layer w12: v1(867.4,1835) 867.4,2168.5 ; v1@871.14,1485 v1(985,1485)
  Bottom Layer w12: v1(865,1485) 867.4,1487.4 v1(867.4,1835) ; v1(985,1485) 1015,1485 1059.06,1440.94 Picaso-SGX.14@1140.94,1440.94
D3: "Lcd 3,2\".12" Picaso-SGX.13 | length 964.6
  Top Layer w12: v1(906.77,1450) 911.77,1445 v1(1005,1445) ; v1(906.77,1866.77) 906.77,2168.5
  Bottom Layer w12: v1(906.77,1450) v1(906.77,1866.77) ; v1(1005,1445) 1028.74,1421.26 Picaso-SGX.13@1140.94,1421.26
D4: "Lcd 3,2\".13" Picaso-SGX.12 | length 931.6
  Top Layer w12: v1@946.14,1830 946.14,2168.5
  Bottom Layer w12: v1(945,1830) 945,1455 998.43,1401.57 Picaso-SGX.12@1140.94,1401.57
D5: "Lcd 3,2\".14" Picaso-SGX.11 | length 1077.3
  Top Layer w12: v1(945,1400) 1010,1400 1040,1430 1040,1615 v1(985,1670) ; v1@985,1865 985.51,1865.51 985.51,2168.5
  Bottom Layer w12: v1(945,1400) 963.11,1381.89 Picaso-SGX.11@1140.94,1381.89 ; v1@984.37,1665.63 v1(984.37,1865.51)
D6: "Lcd 3,2\".15" Picaso-SGX.17 | length 740.4
  Top Layer w12: v1@1024.88,1830.12 1024.88,2168.5
  Bottom Layer w12: v1(1023.74,1830.12) 1023.74,1711.26 1093.62,1641.38 1178.62,1641.38 1219.69,1600.32 Picaso-SGX.17@1219.69,1559.06
D7: "Lcd 3,2\".16" Picaso-SGX.18 | length 727.8
  Top Layer w12: v1(1065,1865) 1065,2167.76
  Bottom Layer w12: v1(1065,1865) 1065,1815 1065,1725 1120,1670 1200,1670 1239.37,1630.63 Picaso-SGX.18@1239.37,1559.06
D8: "Lcd 3,2\".17" Picaso-SGX.21 | length 736.8
  Top Layer w12: 1103.62,1831.38 1103.62,1840 ; 1103.62,2168.5 1103.62,1840 ; v1(1270,1660) 1205,1660 1103.62,1761.38 1103.62,1840
  Bottom Layer w12: v1(1270,1660) 1298.43,1631.57 Picaso-SGX.21@1298.43,1559.06
D9: "Lcd 3,2\".18" Picaso-SGX.22 | length 720.1
  Top Layer w12: 1142.99,2168.5 1142.99,1777.01 v1(1220,1700)
  Bottom Layer w12: v1(1220,1700) 1285,1700 1318.11,1666.89 Picaso-SGX.22@1318.11,1559.06
D10: "Lcd 3,2\".19" Picaso-SGX.23 | length 686.4
  Top Layer w12: 1182.36,2168.5 1182.36,1812.64 v1@1255,1740
  Bottom Layer w12: v1(1260,1740) 1285,1740 1337.8,1687.2 Picaso-SGX.23@1337.8,1559.06
D11: "Lcd 3,2\".20" Picaso-SGX.24 | length 689.1
  Top Layer w12: 1221.73,2168.5 1221.73,1823.27 1265,1780 v1(1300,1780)
  Bottom Layer w12: v1(1300,1780) 1304.96,1780 1357.48,1727.48 1357.48,1690 Picaso-SGX.24@1357.48,1559.06
D12: "Lcd 3,2\".21" Picaso-SGX.27 | length 693.7
  Top Layer w12: v1(1261.1,1835) 1261.1,2168.5
  Bottom Layer w12: v1(1261.1,1835) 1290,1835 1295,1835 1416.54,1713.46 Picaso-SGX.27@1416.54,1559.06
D13: "Lcd 3,2\".22" Picaso-SGX.28 | length 666.1
  Top Layer w12: v1(1300,1875) 1300.47,1875.47 1300.47,2168.5
  Bottom Layer w12: v1(1300,1875) 1436.22,1738.78 Picaso-SGX.28@1436.22,1559.06
D14: "Lcd 3,2\".23" Picaso-SGX.29 | length 657.7
  Top Layer w12: 1339.84,2168.5 1339.84,1915.16 ; 1340,1915 1339.84,1915.16 ; v1(1376.72,1839.19) 1339.84,1876.06 1339.84,1915.16
  Bottom Layer w12: v1(1376.72,1839.19) 1455.91,1760 Picaso-SGX.29@1455.91,1559.06
D15: "Lcd 3,2\".24" Picaso-SGX.30 | length 649
  Top Layer w12: v1@1379.21,1885 1379.21,2168.5
  Bottom Layer w12: v1(1380,1885) 1475.59,1789.41 1475.59,1785 Picaso-SGX.30@1475.59,1559.06
D+: Pic32.37 usb.3 | length 1732.8
  Bottom Layer w12: usb.3@337.17,3820 450,3820 490,3780 490,3485 645,3330 645,3175 690,3130 1325,3130 1391.88,3063.12 Pic32.37@1391.88,2962.15
D-: Pic32.36 usb.4 | length 1691.1
  Bottom Layer w12: usb.4@337.17,3788.5 441.5,3788.5 460,3770 460,3470 615,3315 615,3155 670,3100 1310,3100 1372.19,3037.81 Pic32.36@1372.19,2962.15